# EAGLE board usb-db-revC (EAGLE 9.6.2)
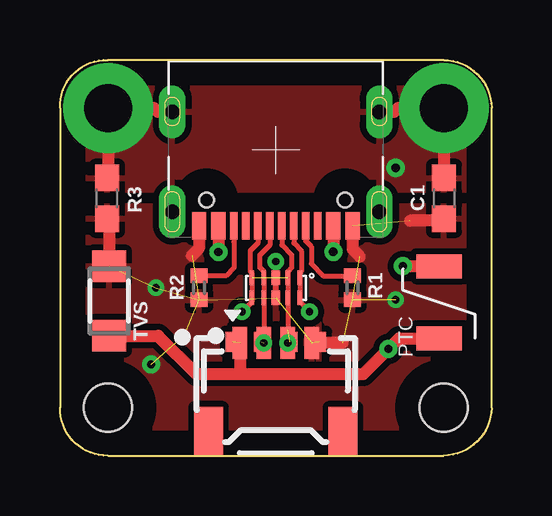
[diagram p0: board, top side]
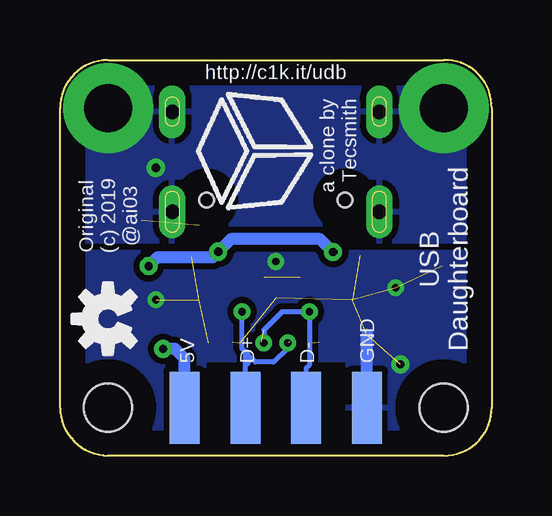
[diagram p1: board, bottom side, seen from below]

Size 18 x 16.5 mm. Coordinates in mm from the lower left corner, seen from the top.
Outline: 2,0 16,0 arc88 18,2 18,14.5 arc89 16,16.5 2,16.5 arc93 0,14.5 0,2 arc92 2,0
Copper layers (1*16): Top 0.035mm / dielectric 1.5mm / Bottom 0.035mm
Design rules "default *": minimum track width 6mil, minimum drill 0.3mm, track to track 6mil, track to pad 6mil, pad to pad 6mil, via to via 6mil, smd to smd 6mil, copper to edge 40mil, drill to drill 6mil, minimum pad ring 10mil, minimum via ring 8mil, stop-mask expansion 4mil, vias tented up to drill 0mil, thermal gap 10mil
Net classes: 0 default: width 0 mm, drill 0 mm
Holes 2 mm at 2,2 16,2
tKeepout: area 0,0 to 4,4; area 14,0 to 18,4
bKeepout: area 0,0 to 4,4; area 14,0 to 18,4

## Footprints (pad centres in the part's own frame; a part is rotated, then mirrored left to right if it is on the bottom)
0603 = smd 1.1 x 1: 1 -0.85,0; 2 0.85,0
1X04_1MM_RA = smd 0.6 x 1.35: 1 -1.5,0; 2 -0.5,0; 3 0.5,0; 4 1.5,0 | smd 1.2 x 2: NC1 2.8,-3.675; NC2 -2.8,-3.675
1X04_SMD_RA_FEMALE = smd 1.25 x 3: 1 -3.81,0; 2 -1.27,0; 3 1.27,0; 4 3.81,0
MOLEX_781710004 = smd 0.6 x 0.85: 1 -1.8,2; 2 -0.6,2; 3 0.6,2; 4 1.8,2 | smd 0.7 x 0.8: NC1 -2.95,-1.775; NC2 2.95,-1.775
SMD_PTC = smd 1 x 1.9: P$1 -1.5,0; P$2 1.5,0
R0402 = smd 0.6 x 0.7: 1 -0.5,0; 2 0.5,0
SOD123FL-BI = smd 1.3 x 1.4: P$1 -1.45,0; P$2 1.45,0
TYPE-C-31-M-12 = smd 0.6 x 1.14: A1B12-GND -3.2,3.16; A4B9-VBUS -2.4,3.16; B1A12-GND 3.2,3.16; B4A9-VBUS 2.4,3.16 | smd 0.3 x 1.14: A5-CC1 -1.25,3.16; A6-DP1 -0.25,3.16; A7-DN1 0.25,3.16; A8-SBU1 1.25,3.16; B5-CC2 1.75,3.16; B6-DP2 0.75,3.16; B7-DN2 -0.75,3.16; B8-SBU2 -1.75,3.16 | drill 0.6 pad 1 long: M1 -4.32,2.59; M2 4.32,2.59; M3 -4.32,-1.59; M4 4.32,-1.59 | hole 0.6: 2.89,2.09; -2.89,2.09
DQA-10-PIN = smd 0.565 x 0.2: P$1 -0.417,1; P$2 -0.417,0.5; P$4 -0.417,-0.5; P$5 -0.417,-1; P$6 0.417,-1; P$7 0.417,-0.5; P$9 0.417,0.5; P$10 0.417,1 | smd 0.565 x 0.36: P$3 -0.417,0; P$8 0.417,0

## Placement (x,y rotation side)
C1  4.7nF  [0603]  16.02,10.73 270 top
J2  SM04B-SRSS-TB(LF)(SN)  [1X04_1MM_RA]  9,4.7 0 top
J3  [1X04_SMD_RA_FEMALE]  9,2 0 bottom
LOGO1  OSHW-LOGOS  [OSHW-LOGO-S]  16,5.7 90 bottom
MOLEX_781710004  [MOLEX_781710004]  9,2.74 0 top
PTC  PTC_ASMD1206-150  [SMD_PTC]  15.81,6.39 270 top
R1  5.1K  [R0402]  12.2,7 270 top
R2  5.1K  [R0402]  5.8,7 270 top
R3  1000K  [0603]  1.96,10.73 90 top
TVS  TVS_SMF9.0CA  [SOD123FL-BI]  2.05,6.45 90 top
U$2  TECSMITH-LOGOSHORT  [TECSMITH-CUBE]  10,12.7 90 bottom
X1  TYPE-C-31-M-12  [TYPE-C-31-M-12]  9,12.75 180 top
Y1  ESD_TPD4E05U06  [DQA-10-PIN]  9,7 270 top

## Library data of the parts
C1 = SparkFun-Capacitors; PROD_ID: CAP-08604
J2 = __untitled
J3 = __untitled; PROD_ID: CONN-12382
LOGO1 = SparkFun-Aesthetics
MOLEX_781710004 = molex-pico-ezmate
PTC TVS X1 Y1 = ts_keyboards
R1 R2 = rcl; SPICEPREFIX: R
R3 = SparkFun-Resistors; PROD_ID: RES-09737
U$2 = random_logos

## Nets
CC1: R1.1 X1.A5-CC1
CC2: R2.1 X1.B5-CC2
D_N: J2.2 J3.2 MOLEX_781710004.2 X1.A7-DN1 X1.B7-DN2 Y1.P$1 Y1.P$4
D_P: J2.3 J3.3 MOLEX_781710004.3 X1.A6-DP1 X1.B6-DP2 Y1.P$2 Y1.P$5
GND: C1.2 J2.4 J3.4 MOLEX_781710004.4 R1.2 R2.2 R3.1 TVS.P$2 X1.A1B12-GND X1.B1A12-GND Y1.P$3 Y1.P$8
GROUND: C1.1 R3.2 X1.M1 X1.M2 X1.M3 X1.M4
VBUS: PTC.P$1 X1.A4B9-VBUS X1.B4A9-VBUS
VSUP: J2.1 J3.1 MOLEX_781710004.1 PTC.P$2 TVS.P$1

## Tracks (layer width: path | path; a pad name or v marks a point on that pad's centre or on a via)
CC1
  Top 0.203: X1.A5-CC1 10.25,8.94 10.48,8.71 10.48,7.99 10.97,7.5 R1.1
CC2
  Top 0.203: X1.B5-CC2 7.25,8.91 7.27,8.89 7.27,7.85 6.92,7.5 R2.1
D_N  (via drill 0.3, 0.3 pad 0.5)  (1 unrouted)
  Top 0.203: X1.A7-DN1 8.75,8.78 8.34,8.37 8.34,7.84 8.5,7.68 Y1.P$4 J2.2 | X1.B7-DN2 9.75,8.86 10.07,8.54 10.07,7.69 10,7.62 Y1.P$1 10,6.4 v10.4,6
  Bottom 0.203: 8.5,4.5 9.1,3.9 9.85,3.9 9.98,4.03 | v10.4,6 10.4,4.45 10.27,4.32 | 9.98,4.03 10.27,4.32 | J3.2 10.27,3.74 | 10.27,3.74 9.98,4.03 | 10.27,3.74 10.27,4.32
  Bottom 0.254: J2.2 8.5,4.5
  other vias: 8.5,4.7
D_P  (via drill 0.3)  (2 unrouted)
  Top 0.203: X1.A6-DP1 9.25,8.78 9.66,8.37 9.66,7.84 9.5,7.68 J2.3 | X1.B6-DP2 8.25,8.86 7.93,8.54 7.93,7.69 8,7.62 Y1.P$5 8,6.4 v7.6,6
  Bottom 0.203: J2.3 9.5,5.24 8.74,6 v7.6,6 7.6,3.78 7.73,3.65 J3.3
  other vias: 9.5,4.7
GND  (via drill 0.3, 0.3 pad 0.55, 0.35)  (12 unrouted)
  Top 0.254: Y1.P$8 Y1.P$3 v9,8.1
  Top 0.508: 11.8,4.7 J2.4 | X1.B1A12-GND 5.8,8.64 5.5,8.34 | X1.A1B12-GND 12.2,8.61 12.51,8.3 | R3.1 2.05,9.79 TVS.P$2 | C1.2 15.94,9.8 14.6,9.8
  Bottom 0.508: J3.4 5.19,5.04
  other vias: 4,7 14,6.5 3.8,3.8
  pour Top (isolate 0.254): 0,10.4 4.74,10.4 4.74,9.12 13.37,9.12 13.37,10.4 18,10.4 18,0 0,0
  pour Bottom (isolate 0.254): 0,0 6,0 6,4 12,4 12,0 18,0 18,8.5 0,8.5
GROUND  (via drill 0.35, 2 pad 3.75)
  Top 0.508: X1.M3 13.94,14.34 14.1,14.5 v16,14.5 16,11.6 C1.1 | R3.2 2.01,11.63 v2.01,14.49 v2,14.5 3.92,14.5 4.08,14.34 X1.M4
  other vias: 14,12
  pour Bottom (isolate 0.254): 0,8.95 18,8.95 18,16.5 0,16.5
  pour Top (isolate 0.254): 0,16.5 0,11.1 18,11.1 18,16.5
VBUS  (via drill 0.35)
  Top 0.508: X1.A4B9-VBUS v11.4,8.5 | X1.B4A9-VBUS v6.61,8.49 | v14.3,7.9 PTC.P$1
  Bottom 0.508: v6.61,8.49 7.15,9.03 10.87,9.03 v11.4,8.5 11.62,8.28 13.92,8.28 v14.3,7.9
VSUP  (via drill 0.35)  (1 unrouted)
  Top 0.508: TVS.P$1 4.1,5 5.7,3.4 7.5,3.4 | J2.1 7.5,3.4 | 7.5,3.4 12.65,3.4 v13.7,4.45 14.14,4.89 PTC.P$2
  Bottom 0.508: J3.1 12.81,4.06 13.2,4.45 v13.7,4.45

## Text on the board
tPlace: PTC
bPlace: http://c1k.it/udb | a clone by / Tecsmith | Original / (c) 2019 / @ai03 | USB / Daughterboard
bNames: GND | D- | D+ | 5V